# EAGLE board controller_old (EAGLE 5.03)
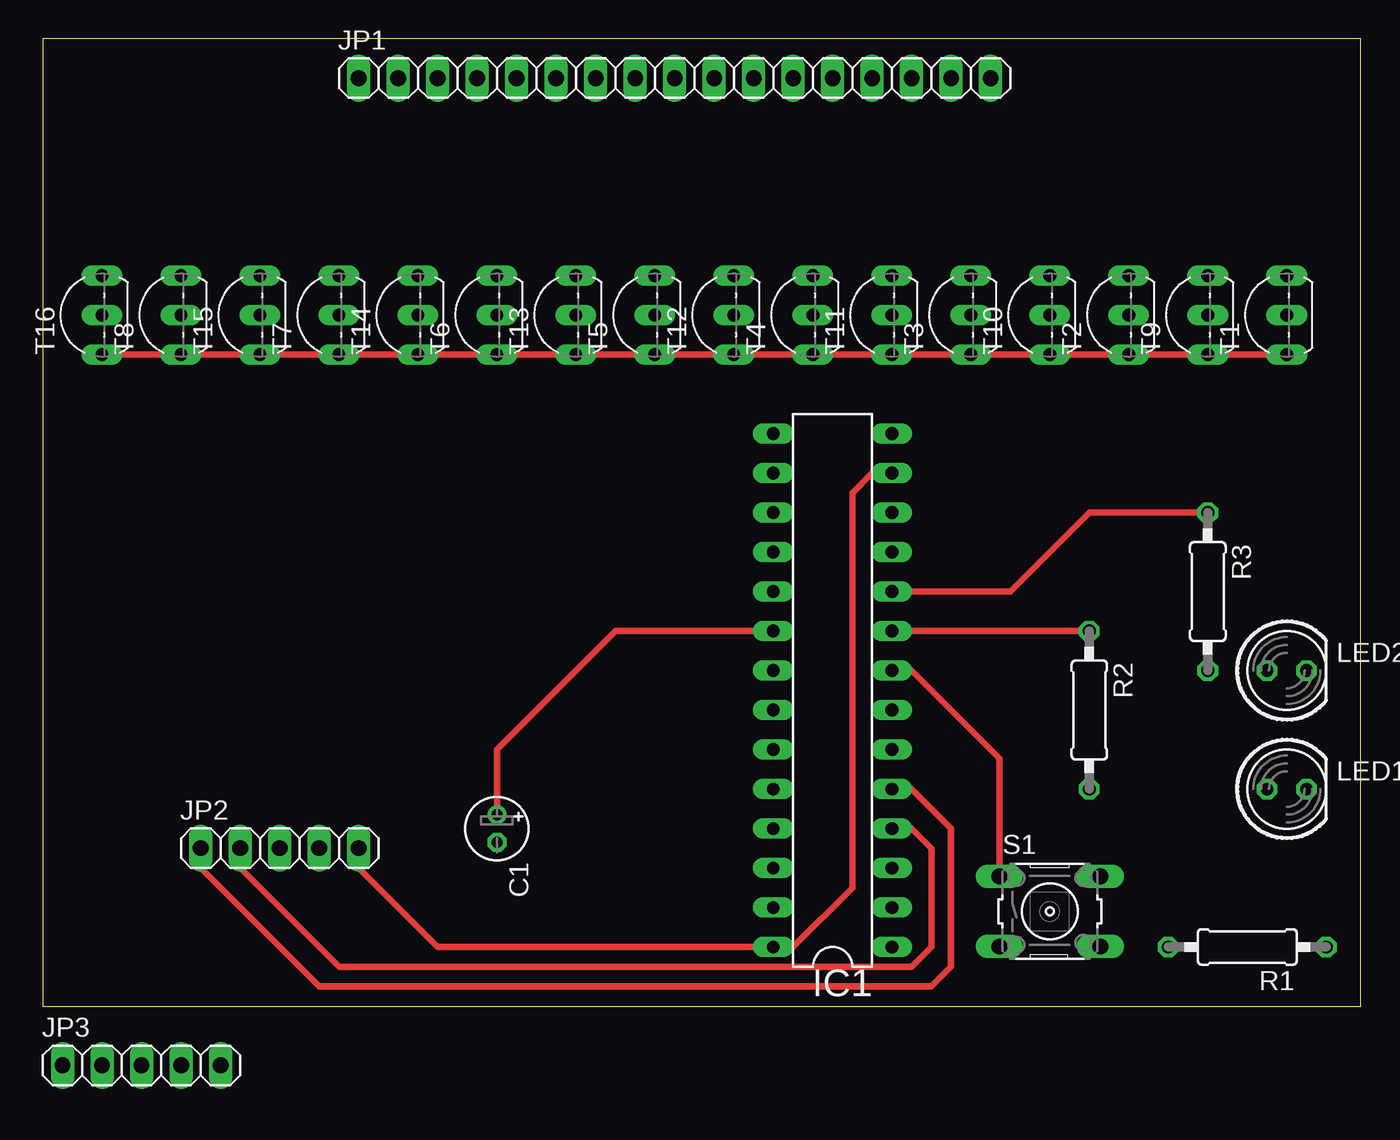
[diagram p0: board, top side]
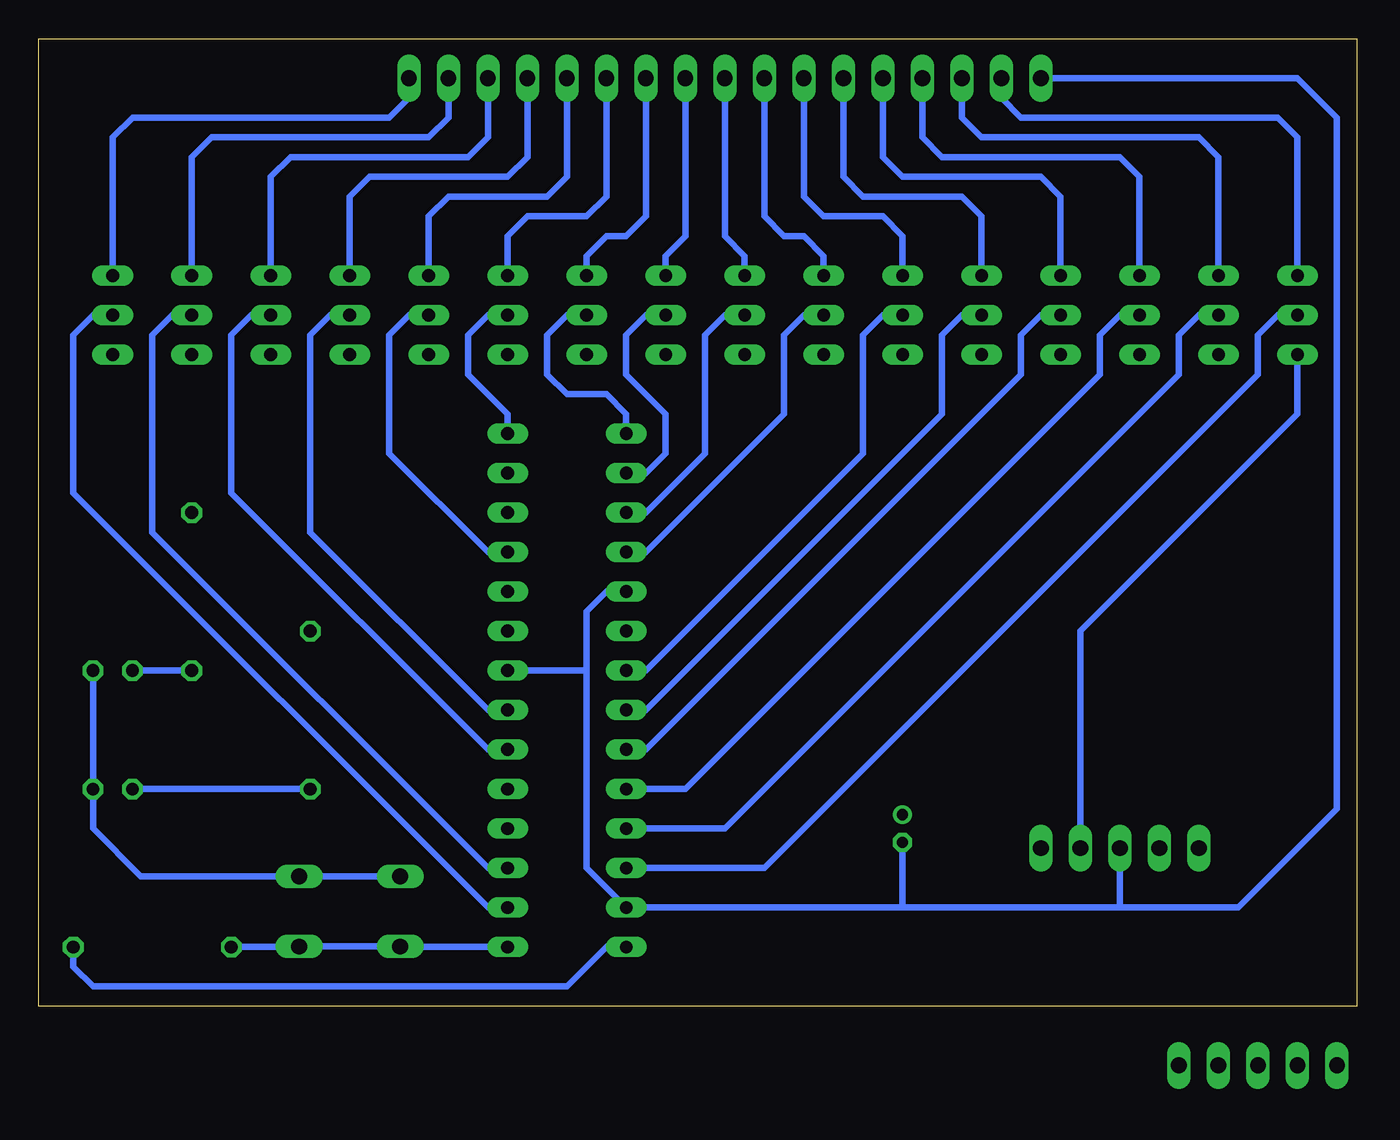
[diagram p1: board, bottom side, seen from below]

Size 84.76 x 62.22 mm. Coordinates in mm from the lower left corner, seen from the top.
Outline: 0,0 84.76,0 84.76,62.22 0,62.22 0,0
Copper layers (1*16): Top 0.035mm / dielectric 1.5mm / Bottom 0.035mm
Design rules "default": minimum track width 10mil, minimum drill 24mil, track to track 8mil, track to pad 8mil, pad to pad 8mil, via to via 8mil, smd to smd 8mil, copper to edge 40mil, drill to drill 8mil, minimum pad ring 10mil, minimum via ring 8mil, stop-mask expansion 4mil, vias tented up to drill 0mil, thermal gap 10mil

## Footprints (pad centres in the part's own frame; a part is rotated, then mirrored left to right if it is on the bottom)
E1,8-4 = drill 0.711 pad 1.168 round: + -0.889,0 | drill 0.711 pad 1.168 octagon: - 0.889,0
DIL28-3 = drill 0.813 long: 1 -16.51,-3.81; 2 -13.97,-3.81; 3 -11.43,-3.81; 4 -8.89,-3.81; 5 -6.35,-3.81; 6 -3.81,-3.81; 7 -1.27,-3.81; 8 1.27,-3.81; 9 3.81,-3.81; 10 6.35,-3.81; 11 8.89,-3.81; 12 11.43,-3.81; 13 13.97,-3.81; 14 16.51,-3.81; 15 16.51,3.81; 16 13.97,3.81; 17 11.43,3.81; 18 8.89,3.81; 19 6.35,3.81; 20 3.81,3.81; 21 1.27,3.81; 22 -1.27,3.81; 23 -3.81,3.81; 24 -6.35,3.81; 25 -8.89,3.81; 26 -11.43,3.81; 27 -13.97,3.81; 28 -16.51,3.81
1X17 = drill 1.016 long: 1 -20.32,0; 2 -17.78,0; 3 -15.24,0; 4 -12.7,0; 5 -10.16,0; 6 -7.62,0; 7 -5.08,0; 8 -2.54,0; 9 0,0; 10 2.54,0; 11 5.08,0; 12 7.62,0; 13 10.16,0; 14 12.7,0; 15 15.24,0; 16 17.78,0; 17 20.32,0
1X05 = drill 1.016 long: 1 -5.08,0; 2 -2.54,0; 3 0,0; 4 2.54,0; 5 5.08,0
LED5MM = drill 0.813 octagon: A -1.27,0; K 1.27,0
0207/10 = drill 0.813 octagon: 1 -5.08,0; 2 5.08,0
B3F-10XX = drill 1.016 long: 1 -3.251,2.261; 2 3.251,2.261; 3 -3.251,-2.261; 4 3.251,-2.261
TO92-CBE = drill 0.813 long: B 0,0; C -2.54,0; E 2.54,0

## Placement (x,y rotation side)
C1  [E1,8-4]  29.21,11.43 270 top
IC1  PIC24FJ16GA002  [DIL28-3]  50.8,20.32 90 top
JP1  [1X17]  40.64,59.69 0 top
JP2  [1X05]  15.24,10.16 0 top
JP3  [1X05]  6.35,-3.81 0 top  (outside the outline)
LED1  [LED5MM]  80.01,13.97 0 top
LED2  [LED5MM]  80.01,21.59 0 top
R1  [0207/10]  77.47,3.81 180 top
R2  [0207/10]  67.31,19.05 270 top
R3  [0207/10]  74.93,26.67 270 top
S1  [B3F-10XX]  64.77,6.1 0 top
T1  [TO92-CBE]  80.01,44.45 90 top
T2  [TO92-CBE]  69.85,44.45 90 top
T3  [TO92-CBE]  59.69,44.45 90 top
T4  [TO92-CBE]  49.53,44.45 90 top
T5  [TO92-CBE]  39.37,44.45 90 top
T6  [TO92-CBE]  29.21,44.45 90 top
T7  [TO92-CBE]  19.05,44.45 90 top
T8  [TO92-CBE]  8.89,44.45 90 top
T9  [TO92-CBE]  74.93,44.45 90 top
T10  [TO92-CBE]  64.77,44.45 90 top
T11  [TO92-CBE]  54.61,44.45 90 top
T12  [TO92-CBE]  44.45,44.45 90 top
T13  [TO92-CBE]  34.29,44.45 90 top
T14  [TO92-CBE]  24.13,44.45 90 top
T15  [TO92-CBE]  13.97,44.45 90 top
T16  [TO92-CBE]  3.81,44.45 90 top

## Library data of the parts
C1 = rcl
IC1 = microchip
JP1-JP3 = pinhead
LED1 LED2 = led
R1-R3 = resistor
S1 = switch-omron
T1-T16 = transistor

## Nets
+3V3: IC1.13 IC1.28 JP2.5 R1.1
+5V: JP2.4 T1.C T2.C T3.C T4.C T5.C T6.C T7.C T8.C T9.C T10.C T11.C T12.C T13.C T14.C T15.C T16.C
GND: C1.- IC1.8 IC1.19 IC1.27 JP1.1 JP2.3 LED1.K LED2.K S1.1 S1.2
N$1: IC1.2 T1.B
N$2: IC1.3 T9.B
N$3: IC1.6 T2.B
N$4: IC1.7 T10.B
N$5: IC1.11 T3.B
N$6: IC1.14 T11.B
N$7: IC1.15 T4.B
N$8: IC1.16 T12.B
N$9: IC1.17 T5.B
N$10: IC1.18 T13.B
N$11: IC1.21 T6.B
N$12: IC1.22 T14.B
N$13: IC1.23 T7.B
N$14: IC1.24 T15.B
N$15: IC1.25 T8.B
N$16: IC1.26 T16.B
N$17: JP1.10 T12.E
N$18: JP1.12 T11.E
N$19: JP1.13 T3.E
N$20: JP1.11 T4.E
N$21: JP1.9 T5.E
N$22: JP1.17 T1.E
N$23: JP1.16 T9.E
N$24: JP1.15 T2.E
N$25: JP1.14 T10.E
N$26: JP1.8 T13.E
N$27: JP1.7 T6.E
N$28: JP1.6 T14.E
N$29: JP1.5 T7.E
N$30: JP1.4 T15.E
N$31: JP1.3 T8.E
N$32: JP1.2 T16.E
N$33: IC1.1 R1.2 S1.3 S1.4
N$34: LED1.A R2.2
N$35: IC1.5 JP2.1
N$36: IC1.4 JP2.2
N$37: IC1.9 R2.1
N$38: C1.+ IC1.20
N$39: IC1.10 R3.1
N$40: LED2.A R3.2

## Tracks (layer width: path | path; a pad name or v marks a point on that pad's centre or on a via)
+3V3
  Top 0.406: IC1.13 53.34,34.29 52.07,33.02 52.07,7.62 48.26,3.81 IC1.28 25.4,3.81 20.32,8.89 JP2.5
  Bottom 0.406: IC1.28 48.26,3.81 50.8,1.27 81.28,1.27 82.55,2.54 R1.1
+5V
  Top 0.406: T16.C T8.C | T8.C T15.C | T14.C T6.C | T6.C T13.C | T13.C T5.C | T5.C T12.C | T12.C T4.C | T4.C T11.C | T11.C T3.C | T3.C T10.C | T10.C T2.C | T2.C T9.C | T9.C T1.C T9.C | T8.C T15.C | T15.C T7.C | T7.C T14.C | T7.C T14.C | T14.C T6.C | T6.C T13.C | T13.C T5.C | T5.C T12.C | T12.C T4.C | T4.C T11.C | T11.C T3.C | T3.C T10.C | T10.C T2.C | T2.C T9.C
  Bottom 0.406: JP2.4 17.78,24.13 3.81,38.1 T16.C
GND
  Top 0.406: S1.1 61.52,15.95 55.88,21.59 IC1.8
  Bottom 0.406: JP1.1 3.81,59.69 1.27,57.15 1.27,12.7 7.62,6.35 15.24,6.35 | S1.1 S1.2 78.21,8.36 81.28,11.43 LED1.K LED2.K | 15.24,6.35 JP2.3 | 49.53,21.59 49.53,8.89 IC1.27 29.21,6.35 | 49.53,21.59 IC1.8 | IC1.19 48.26,26.67 49.53,25.4 49.53,21.59 | 15.24,6.35 29.21,6.35 | 29.21,6.35 C1.-
N$1
  Bottom 0.406: T1.B 81.28,44.45 82.55,43.18 82.55,33.02 55.88,6.35 IC1.2
N$2
  Bottom 0.406: T9.B 76.2,44.45 77.47,43.18 77.47,30.48 55.88,8.89 IC1.3
N$3
  Bottom 0.406: T2.B 71.12,44.45 72.39,43.18 72.39,33.02 55.88,16.51 IC1.6
N$4
  Bottom 0.406: T10.B 66.04,44.45 67.31,43.18 67.31,30.48 55.88,19.05 IC1.7
N$5
  Bottom 0.406: T3.B 60.96,44.45 62.23,43.18 62.23,35.56 55.88,29.21 IC1.11
N$6
  Bottom 0.406: IC1.14 54.61,38.1 57.15,40.64 57.15,43.18 55.88,44.45 T11.B
N$7
  Bottom 0.406: IC1.15 46.99,38.1 48.26,39.37 50.8,39.37 52.07,40.64 52.07,43.18 50.8,44.45 T4.B
N$8
  Bottom 0.406: IC1.16 45.72,34.29 44.45,35.56 44.45,38.1 46.99,40.64 46.99,43.18 45.72,44.45 T12.B
N$9
  Bottom 0.406: IC1.17 45.72,31.75 41.91,35.56 41.91,43.18 40.64,44.45 T5.B
N$10
  Bottom 0.406: IC1.18 45.72,29.21 36.83,38.1 36.83,43.18 35.56,44.45 T13.B
N$11
  Bottom 0.406: IC1.21 45.72,21.59 31.75,35.56 31.75,43.18 30.48,44.45 T6.B
N$12
  Bottom 0.406: IC1.22 45.72,19.05 26.67,38.1 26.67,43.18 25.4,44.45 T14.B
N$13
  Bottom 0.406: IC1.23 45.72,16.51 21.59,40.64 21.59,43.18 20.32,44.45 T7.B
N$14
  Bottom 0.406: IC1.24 43.18,13.97 16.51,40.64 16.51,43.18 15.24,44.45 T15.B
N$15
  Bottom 0.406: IC1.25 40.64,11.43 11.43,40.64 11.43,43.18 10.16,44.45 T8.B
N$16
  Bottom 0.406: IC1.26 38.1,8.89 6.35,40.64 6.35,43.18 5.08,44.45 T16.B
N$17
  Bottom 0.406: T12.E 44.45,48.26 43.18,49.53 JP1.10
N$18
  Bottom 0.406: JP1.12 48.26,52.07 49.53,50.8 53.34,50.8 54.61,49.53 T11.E
N$19
  Bottom 0.406: T3.E 59.69,50.8 58.42,52.07 52.07,52.07 50.8,53.34 JP1.13
N$20
  Bottom 0.406: JP1.11 45.72,50.8 46.99,49.53 48.26,49.53 49.53,48.26 T4.E
N$21
  Bottom 0.406: T5.E 39.37,48.26 40.64,49.53 JP1.9
N$22
  Bottom 0.406: T1.E 80.01,55.88 78.74,57.15 62.23,57.15 60.96,58.42 JP1.17
N$23
  Bottom 0.406: JP1.16 58.42,57.15 59.69,55.88 73.66,55.88 74.93,54.61 T9.E
N$24
  Bottom 0.406: T2.E 69.85,53.34 68.58,54.61 57.15,54.61 55.88,55.88 JP1.15
N$25
  Bottom 0.406: JP1.14 53.34,54.61 54.61,53.34 63.5,53.34 64.77,52.07 T10.E
N$26
  Bottom 0.406: T13.E 34.29,48.26 35.56,49.53 36.83,49.53 38.1,50.8 JP1.8
N$27
  Bottom 0.406: T6.E 29.21,49.53 30.48,50.8 34.29,50.8 35.56,52.07 JP1.7
N$28
  Bottom 0.406: T14.E 24.13,50.8 25.4,52.07 31.75,52.07 33.02,53.34 JP1.6
N$29
  Bottom 0.406: T7.E 19.05,52.07 20.32,53.34 29.21,53.34 30.48,54.61 JP1.5
N$30
  Bottom 0.406: T15.E 13.97,53.34 15.24,54.61 26.67,54.61 27.94,55.88 JP1.4
N$31
  Bottom 0.406: T8.E 8.89,54.61 10.16,55.88 24.13,55.88 25.4,57.15 JP1.3
N$32
  Bottom 0.406: T16.E 3.81,55.88 5.08,57.15 21.59,57.15 22.86,58.42 JP1.2
N$33
  Bottom 0.406: IC1.1 61.49,3.81 S1.3 S1.4 68.05,3.81 R1.2
N$34
  Bottom 0.406: LED1.A R2.2
N$35
  Top 0.406: IC1.5 55.88,13.97 58.42,11.43 58.42,2.54 57.15,1.27 17.78,1.27 10.16,8.89 JP2.1
N$36
  Top 0.406: IC1.4 55.88,11.43 57.15,10.16 57.15,3.81 55.88,2.54 19.05,2.54 12.7,8.89 JP2.2
N$37
  Top 0.406: IC1.9 R2.1
N$38
  Top 0.406: C1.+ 29.21,16.51 36.83,24.13 IC1.20
N$39
  Top 0.406: IC1.10 62.23,26.67 67.31,31.75 R3.1
N$40
  Bottom 0.406: R3.2 LED2.A